# Altium PCB PCB1.1.PcbDoc (part 2 of 2)
Units mm, origin at the board's own origin, x right, y up, seen from the top; angles counter-clockwise.
Board outline 50 x 50 mm, 4 copper layers (Top Layer, Mid-Layer 1, Mid-Layer 2, Bottom Layer); 153 components, 106 nets, 555 pads, 173 vias.
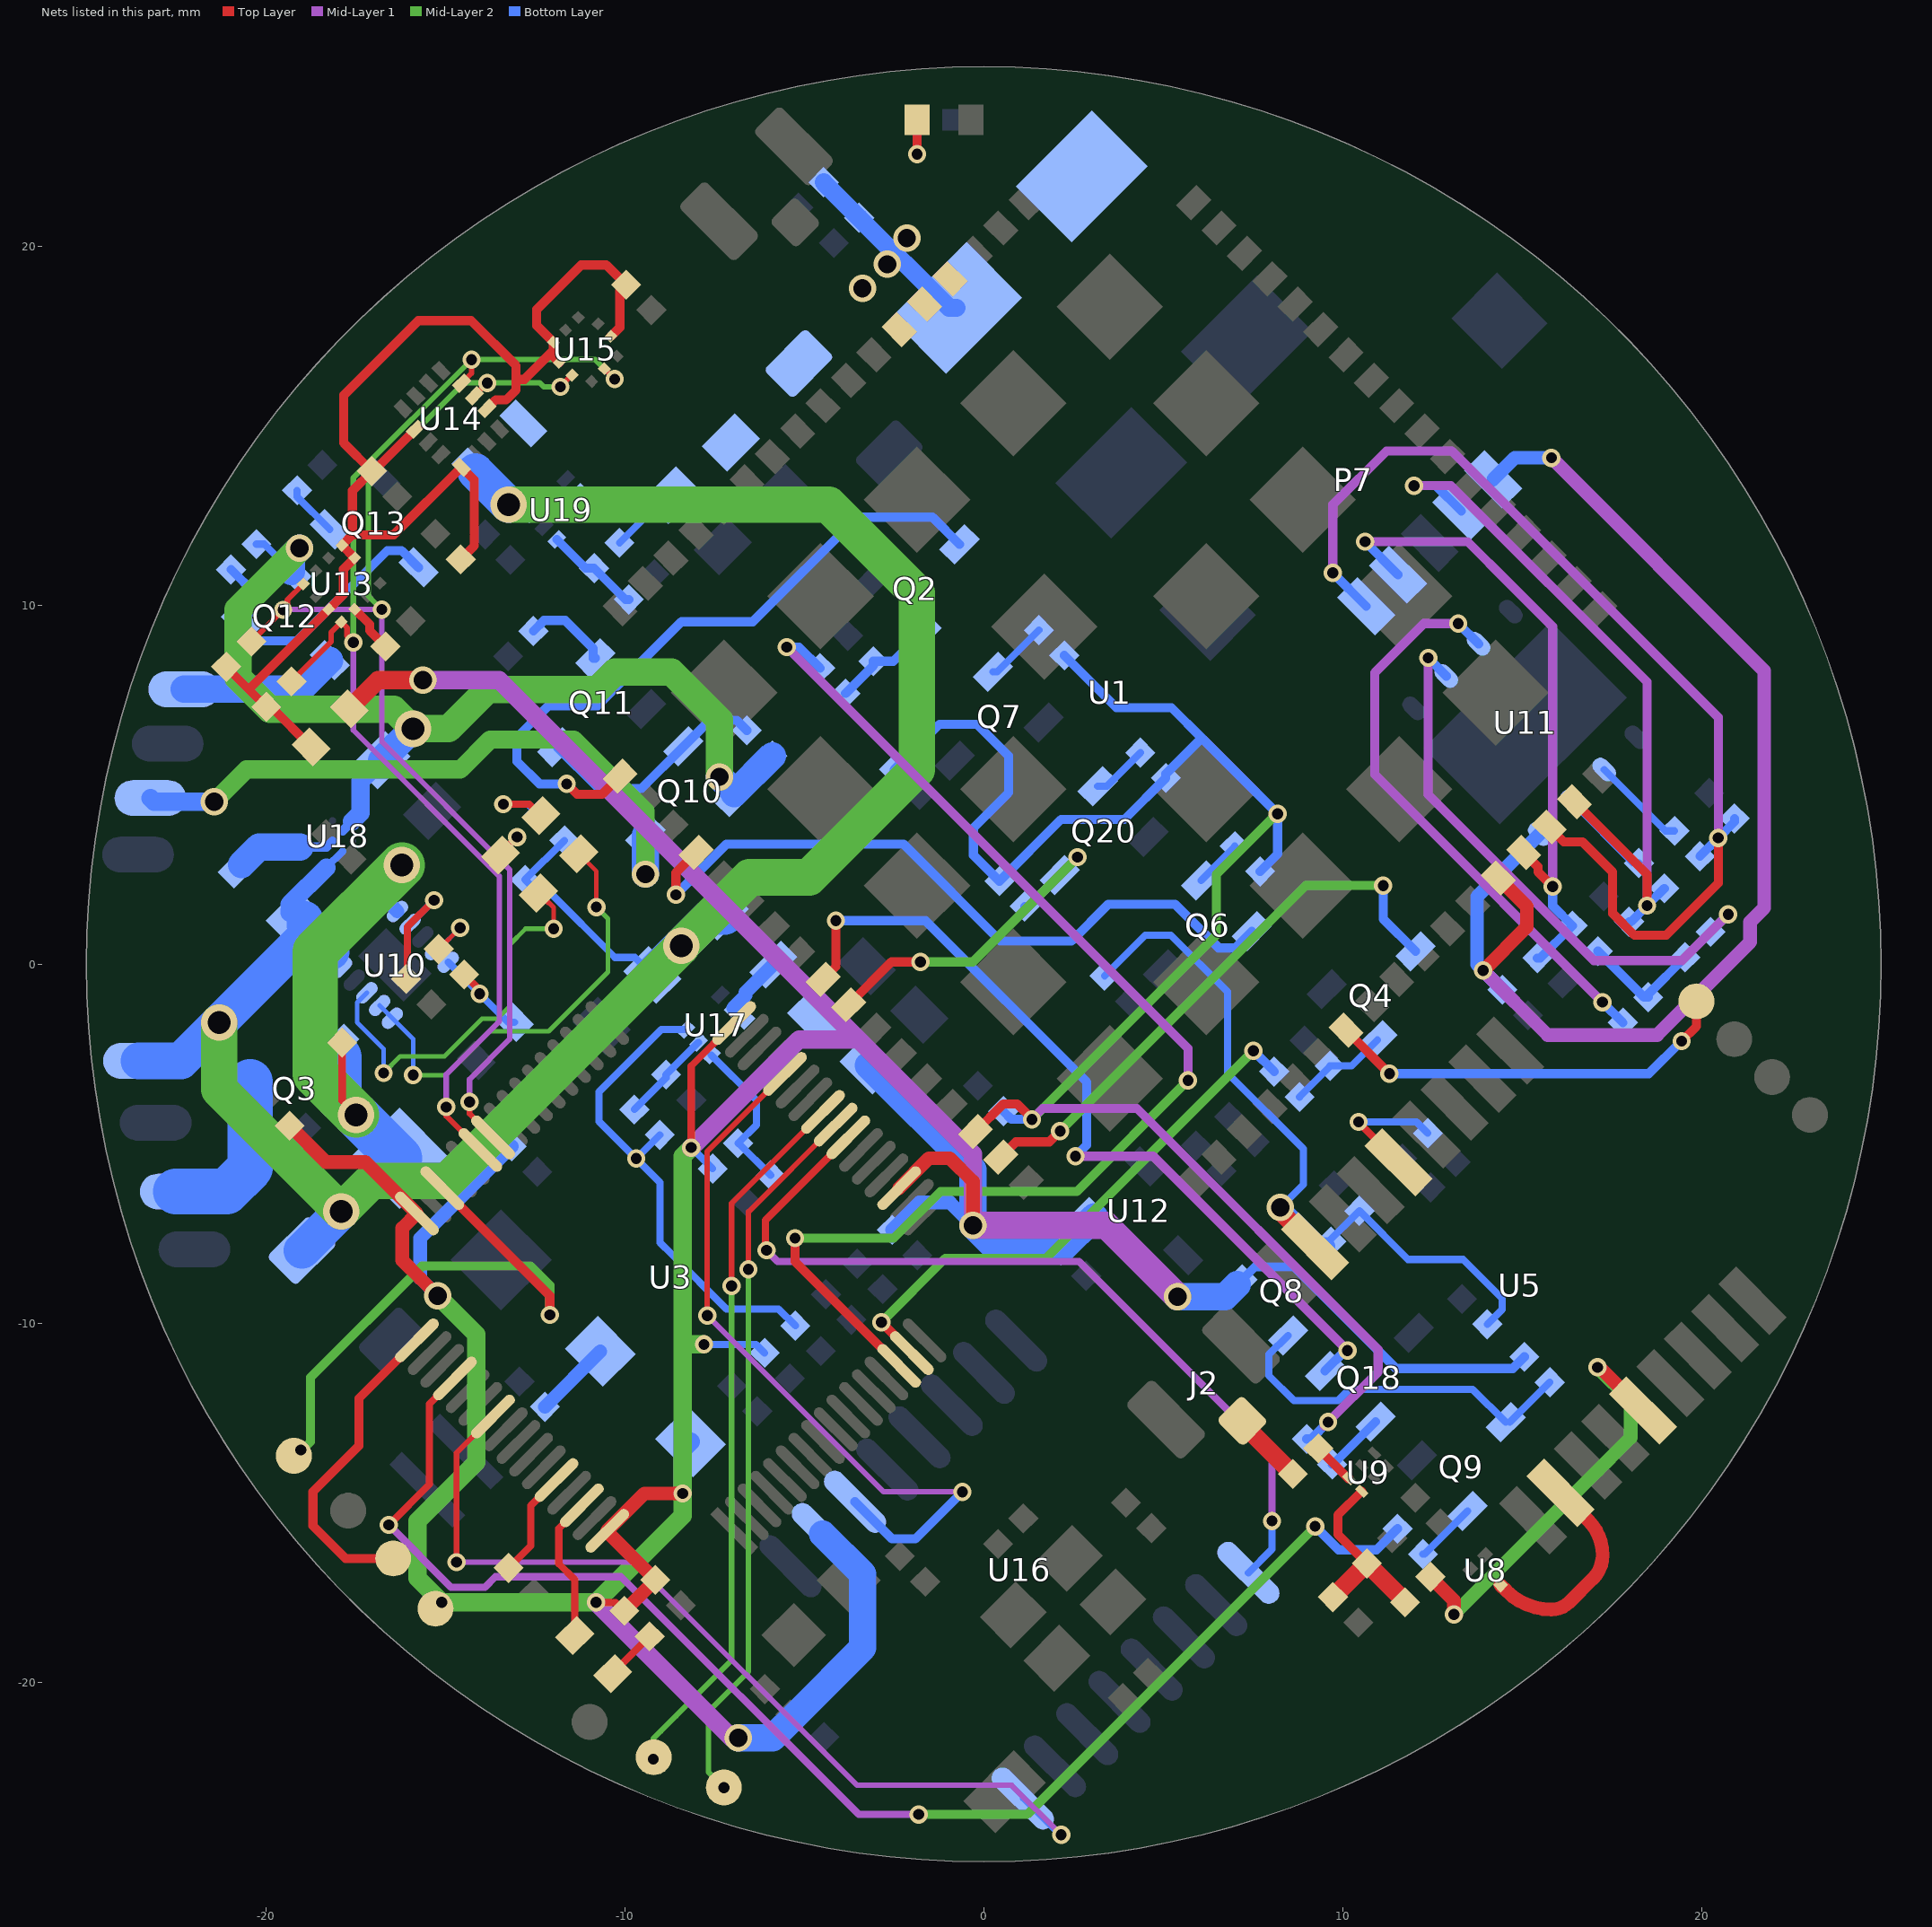
[diagram p4: the nets of this part, all layers, seen from the top]

## Via types
v1: diameter 0.508, hole 0.305, Top Layer to Bottom Layer, tented both sides, 144 vias
v2: diameter 0.762, hole 0.508, Top Layer to Bottom Layer, tented both sides, 21 vias
v3: diameter 1.016, hole 0.635, Top Layer to Bottom Layer, tented both sides, 8 vias

## Nets (pads, with @x,y where several pads share a name; then routed paths per layer and width w, separated by ;. In a path a pad name is that pad's centre, name@x,y a point inside that pad or via, vN(x,y) a via of type N, cw(c..) or ccw(c..) an arc to the next point about the centre after c; other vN are vias at no path point) (continued)
NetC27_1: C27.1 D2.2 Q3.3 U10.1 | length 15.2
  Top Layer w0.203: C27.1@-17.876,-2.181 -17.876,-3.807 v3(-17.485,-4.198)
  Mid-Layer 2 w1.27: v3(-17.485,-4.198) -18.627,-3.056 -18.627,0.344 v3(-16.211,2.76)
  Bottom Layer w0.381: -16.731,2.24 -16.731,1.863 U10.1@-16.336,1.468
  Bottom Layer w1.016: -16.731,2.24 v3(-16.211,2.76)
  Bottom Layer w1.27: Q3.3@-18.004,-2.55 -17.964,-2.59 -17.964,-3.719 ; v3(-17.485,-4.198) D2.2@-16.276,-5.407
NetC40_1: C40.1 U13.5 | length 1.4
  Top Layer w0.254: U13.5@-17.527,9.885 -17.11,9.468 -17.11,9.293 C40.1@-16.669,8.852
NetD1_2: D1.2 R7.1 | length 2.2
  Bottom Layer w0.381: R7.1@-12.226,-12.329 D1.2@-10.682,-10.784
NetJ2_1: J2.1 L3.2 | length 2.1
  Top Layer w0.508: J2.1@7.201,-12.718 7.201,-12.787 L3.2@8.611,-14.196
NetL2_1: L2.1 U5.14 | length 12.9
  Top Layer w0.381: L2.1@12.443,-17.067 13.096,-17.72 v1(13.096,-18.11) ; v1(17.097,-11.227) 17.161,-11.227 U5.14@18.364,-12.43
  Mid-Layer 2 w0.381: v1(13.096,-18.11) 17.109,-14.097 ; v1(17.097,-11.227) 18.023,-12.153 18.023,-13.183 17.109,-14.097 ; 17.468,-13.738 17.109,-14.097
NetL3_1: L3.1 U9.3 | length 1.2
  Top Layer w0.254: L3.1@9.318,-13.489 10.154,-14.325 U9.3@10.175,-14.325
NetL4_1: L4.1 U17.5 | length 1.7
  Bottom Layer w0.381: U17.5@-6.982,-1.214 -6.637,-0.869 -6.637,-0.783 L4.1@-5.869,-0.015
NetL5_2: L5.2 U18.B1 | length 2.8
  Bottom Layer w0.254: -19.051,3.263 -18.313,3.263 U18.B1@-18.144,3.432
  Bottom Layer w0.762: L5.2@-20.682,2.776 -20.194,3.263 -19.051,3.263
NetL6_1: L6.1 U19.5
NetLED1_2: LED1.2 R9.1 | length 1.9
  Top Layer w0.254: v1(-1.857,22.562) LED1.2@-1.857,23.523
  Bottom Layer w0.254: v1(-1.857,22.562) R9.1@-1.857,23.523
NetLED2_1: LED2.1 R29.2 | length 2.3
  Top Layer w0.203: v1(-13.386,4.458) -12.663,4.458 LED2.1@-12.342,4.137
  Bottom Layer w0.203: v1(-13.386,4.458) -12.692,4.458 R29.2@-12.39,4.156
NetLED2_2: LED2.2 U10.6 U10.7 | length 13
  Top Layer w0.127: LED2.2@-11.281,3.076 -10.792,2.587 ; v1(-10.792,1.593) -10.792,2.587 ; -10.792,2.194 -10.792,2.587
  Mid-Layer 2 w0.127: v1(-15.899,-3.088) -14.994,-3.088 -13.773,-1.867 -12.121,-1.867 -10.472,-0.218 -10.472,1.273 v1(-10.792,1.593)
  Bottom Layer w0.127: U10.7@-16.831,-1.148 U10.6@-16.478,-1.502 -15.899,-2.081 v1(-15.899,-3.088)
NetLED4_1: LED4.1 R12.2 | length 1.4
  Top Layer w0.203: LED4.1@-13.468,3.043 -13.468,3.078 v1(-13.003,3.543)
  Bottom Layer w0.203: R12.2@-13.485,3.06 v1(-13.003,3.543)
NetLED4_2: LED4.2 U10.8 | length 11.6
  Top Layer w0.127: -12.139,1.714 LED4.2@-12.407,1.982 -12.382,1.982 -11.982,1.582 v1(-11.982,0.99)
  Mid-Layer 2 w0.127: v1(-16.722,-3.028) -16.261,-2.567 -15.027,-2.567 -13.976,-1.516 -13.552,-1.516 -13.206,-1.17 -13.206,0.548 -12.764,0.99 v1(-11.982,0.99)
  Bottom Layer w0.127: U10.8@-17.185,-0.795 -17.458,-1.068 -17.458,-1.622 -16.722,-2.358 v1(-16.722,-3.028)
NetLED5_1: LED5.1 R65.1 | length 1.5
  Top Layer w0.203: LED5.1@-10.335,-19.758 -10.335,-19.746 R65.1@-9.31,-18.721
NetLED5_2: LED5.2 U3.62 | length 4.1
  Top Layer w0.203: LED5.2@-11.396,-18.697 -11.396,-17.141 -11.839,-16.698 -11.839,-15.715 U3.62@-11.198,-15.074
NetQ2_1: Q2.1 R10.1 R11.1 | length 2.9
  Bottom Layer w0.254: R10.1@-3.853,7.542 -3.077,8.318 R11.1@-3.077,8.438 -2.521,8.438 Q2.1@-1.737,9.223
NetQ4_1: Q4.1 R4.1 R16.1 | length 2.8
  Bottom Layer w0.203: R16.1@8.797,-3.697 9.645,-2.849 R4.1@9.645,-2.832 10.247,-2.832 Q4.1@10.968,-2.112
NetQ6_1: Q6.1 R28.1 | length 1.3
  Bottom Layer w0.203: Q6.1@6.057,2.331 6.993,3.267 R28.1@6.993,3.291
NetQ7_1: Q7.1 R31.1 | length 1.8
  Bottom Layer w0.203: Q7.1@0.253,8.144 0.373,8.144 R31.1@1.536,9.307
NetQ8_1: Q8.1 Q9.3 R33.2 | length 10.3
  Bottom Layer w0.203: Q8.1@8.476,-10.338 7.946,-10.868 7.946,-11.462 8.639,-12.155 9.866,-12.155 10.181,-11.84 13.62,-11.84 Q9.3@14.538,-12.758 ; Q9.3@14.654,-12.758 R33.2@15.768,-11.644
NetQ9_1: Q9.1 R34.1 | length 1.7
  Bottom Layer w0.203: R34.1@12.234,-16.432 12.279,-16.432 Q9.1@13.478,-15.233
NetQ10_1: Q10.1 Q11.3 R36.2 | length 6.7
  Bottom Layer w0.254: Q11.3@-11.886,6.05 -10.734,4.899 -9.534,4.899 Q10.1@-8.367,6.067 -7.641,6.792 -6.88,6.792 R36.2@-6.602,6.514
NetQ11_1: Q11.1 R37.1 | length 2.5
  Bottom Layer w0.254: R37.1@-12.547,9.281 -12.253,9.575 -11.666,9.575 -10.879,8.788 Q11.1@-10.879,8.579 ; Q11.1@-10.879,8.579 Q11.1@-10.825,8.525 -10.879,8.525 Q11.1@-10.879,8.579
NetQ12_1: Q12.1 Q13.3 R50.2 | length 8.3
  Bottom Layer w0.254: R50.2@-20.971,10.994 -20.305,10.328 -20.305,9.926 Q12.1@-20.701,9.53 -20.175,9.004 -19.14,9.004 -16.622,11.522 -16.217,11.522 Q13.3@-15.748,11.053
NetQ13_1: Q13.1 R51.1 | length 1.5
  Bottom Layer w0.203: R51.1@-19.131,13.2 -19.131,13.022 Q13.1@-18.223,12.114
NetQ18_1: Q18.1 R40.1 | length 1.7
  Bottom Layer w0.254: R40.1@9.707,-13.93 9.73,-13.93 Q18.1@10.916,-12.744
NetQ20_1: Q20.1 R44.1 | length 1.6
  Bottom Layer w0.203: Q20.1@3.173,4.956 3.426,4.956 R44.1@4.364,5.894
NetR3_1: R3.1 U3.60 | length 3
  Top Layer w0.203: R3.1@-13.239,-16.816 -12.62,-16.197 -12.62,-15.082 U3.60@-11.905,-14.367
NetR13_1: R13.1 U10.2 | length 3.5
  Top Layer w0.203: R13.1@-16.095,-0.41 -16.053,-0.368 -16.053,1.044 v1(-15.313,1.784)
  Bottom Layer w0.203: U10.2@-15.983,1.114 v1(-15.313,1.784)
NetR14_1: R14.1 R15.2 U10.5 | length 3.3
  Top Layer w0.203: R14.1@-14.476,-0.286 -14.044,-0.719 v1(-14.044,-0.824)
  Bottom Layer w0.203: U10.5@-14.922,0.054 v1(-14.044,-0.824) -13.251,-1.617 R15.2@-13.075,-1.617
NetR14_2: R14.2 U10.4 | length 1.8
  Top Layer w0.127: R14.2@-15.183,0.421 v1(-14.591,1.013)
  Bottom Layer w0.127: U10.4@-15.276,0.407 -15.197,0.407 v1(-14.591,1.013)
NetR18_1: R18.1 U5.5 | length 3.6
  Top Layer w0.203: v1(10.443,-4.39) 10.443,-4.402 U5.5@11.559,-5.517
  Bottom Layer w0.203: v1(10.443,-4.39) 12.056,-4.39 R18.1@12.371,-4.705
NetR19_2: R19.2 R20.2 U19.1 | length 2.7
  Bottom Layer w0.254: U19.1@-11.897,11.831 -11.097,11.032 R19.2@-10.857,11.032 -9.985,10.16 R20.2@-9.886,10.16
NetR21_2: R21.2 R48.2 U17.1 | length 4.5
  Bottom Layer w0.203: U17.1@-7.591,-2.53 -6.335,-3.786 -6.335,-4.475 R21.2@-6.847,-4.987 -6.832,-4.987 R48.2@-5.938,-5.881
NetR23_2: R23.2 U11.7 | length 2.6
  Bottom Layer w0.203: U11.7@16.387,4.526 18.094,2.819 R23.2@18.253,2.819
NetR25_1: R25.1 U11.3 | length 16.3
  Mid-Layer 1 w0.254: v1(13.218,9.491) 12.262,9.491 10.895,8.124 10.895,5.284 11.684,4.495 v1(17.236,-1.057)
  Bottom Layer w0.254: v1(13.218,9.491) U11.3@13.785,8.924 ; v1(17.236,-1.057) R25.1@17.806,-1.627
NetR25_2: R25.2 R26.2 R27.2 | length 3.5
  Bottom Layer w0.254: R27.2@17.11,0.365 18.395,-0.92 R25.2@18.513,-0.92 18.513,-0.835 R26.2@19.542,0.194
NetR26_1: R26.1 U11.2 | length 16
  Mid-Layer 1 w0.254: v1(12.382,8.531) 12.382,4.721 17,0.103 19.451,0.103 v1(20.739,1.391)
  Bottom Layer w0.254: v1(12.382,8.531) U11.2@12.887,8.026 ; R26.1@20.249,0.901 v1(20.739,1.391)
NetR35_2: R35.2 R49.2 U17.2 | length 2.6
  Bottom Layer w0.203: R49.2@-9.734,-4.046 -8.853,-3.165 R35.2@-8.853,-3.076 -7.954,-2.176 U17.2@-7.944,-2.176
NetR39_2: R39.2 U11.6 | length 2.7
  Bottom Layer w0.203: U11.6@17.285,5.424 18.996,3.713 R39.2@19.245,3.713
POWER_CTRL_GPS: R34.2 U3.52 | length 40.4
  Top Layer w0.203: v1(-16.575,-15.618) -15.444,-14.487 -15.444,-12.249 U3.52@-14.733,-11.538
  Mid-Layer 1 w0.203: v1(-16.575,-15.618) -14.843,-17.35 -14.541,-17.35 -14.122,-17.35 -13.899,-17.35 -13.609,-17.06 -10.104,-17.06 -3.481,-23.683 v1(-1.814,-23.683)
  Mid-Layer 2 w0.254: v1(-1.814,-23.683) 1.208,-23.683 v1(9.233,-15.658)
  Bottom Layer w0.254: v1(9.233,-15.658) 9.885,-16.31 10.942,-16.31 R34.2@11.527,-15.725
PWRKEY: Q2.3 U1.1 | length 19.3
  Top Layer w0.254: v1(-11.619,5.023) -11.333,4.737 -10.63,4.737 U1.1@-10.132,5.235
  Bottom Layer w0.254: v1(-11.619,5.023) -12.377,5.023 -13.006,5.652 -13.006,6.322 -12.129,7.199 -10.763,7.199 -8.424,9.538 -6.436,9.538 -3.522,12.452 -1.431,12.452 Q2.3@-0.676,11.698
RESET: Q4.3 U1.16 | length 16.4
  Top Layer w0.254: U1.16@0.474,-5.372 0.896,-4.95 1.825,-4.95 v1(2.127,-4.648)
  Mid-Layer 2 w0.254: v1(2.127,-4.648) 8.971,2.196 10.089,2.196 ; 10.477,2.196 10.089,2.196 ; v1(11.127,2.19) 11.121,2.196 10.089,2.196
  Bottom Layer w0.254: v1(11.127,2.19) 11.127,1.265 Q4.3@12.028,0.363
RF_IN: U5.11 U8.1 | length 6
  Top Layer w0.381: U8.1@14.397,-17.291 14.566,-17.46 ccw(c15.81,-16.215) 15.81,-17.975 ccw(c15.81,-17.258) 16.317,-17.765 16.971,-17.111 ccw(c16.319,-16.459) 17.241,-16.459 ccw(c15.875,-16.459) 16.841,-15.493 U5.11@16.071,-14.723
RI: Q6.2 U1.4 | length 20.3
  Top Layer w0.254: v1(-8.575,1.936) -8.575,2.549 U1.4@-8.011,3.113
  Bottom Layer w0.254: v1(-8.575,1.936) -7.163,3.348 -2.24,3.348 0.462,0.646 2.445,0.646 3.472,1.673 5.326,1.673 6.546,0.453 7.007,0.453 Q6.2@7.471,0.917
RXD3: T18.1 U3.25 | length 20.6
  Top Layer w0.152: v1(-7.026,-8.96) -7.026,-6.66 U3.25@-4.48,-4.114
  Mid-Layer 2 w0.152: v1(-9.21,-22.142) -9.21,-21.571 -8.576,-20.937 ; -8.999,-21.36 -8.576,-20.937 ; v1(-7.026,-8.96) -7.026,-19.387 -8.576,-20.937
SCL: R22.2 U3.42 U13.1 U14.13 U15.2 | length 33.1
  Top Layer w0.152: R22.2@-20.399,8.991 v1(-19.521,9.869) -19.402,9.988 -19.402,10.149 U13.1@-18.958,10.592 ; v1(-14.327,-3.835) -14.327,-4.166 U3.42@-13.673,-4.821 ; U14.13@-14.191,15.834 v1(-13.834,16.191) ; v1(-11.797,16.084) U15.2@-11.472,16.409
  Mid-Layer 1 w0.152: v1@-19.477,9.971 -19.386,9.88 v1(-16.771,9.88) -16.771,6.199 -13.209,2.637 -13.209,-2.088 -14.327,-3.206 v1(-14.327,-3.835)
  Mid-Layer 2 w0.152: v1(-16.771,9.88) -17.146,10.255 -17.146,13.53 -14.485,16.191 v1(-13.834,16.191) -12.366,16.191 -12.259,16.084 v1(-11.797,16.084)
SCLK: U3.55 U16.16 | length 26
  Top Layer w0.152: v1(-14.689,-16.654) -14.689,-13.616 U3.55@-13.673,-12.599
  Mid-Layer 1 w0.152: v1(-14.689,-16.654) -9.748,-16.654 -3.531,-22.871 0.778,-22.871 v1(2.157,-24.25)
  Bottom Layer w0.152: U16.16@1.086,-23.24 2.096,-24.25 v1(2.157,-24.25)
SDA: R24.1 U3.43 U13.4 U14.14 U15.4 | length 34.4
  Top Layer w0.152: R24.1@-19.285,7.877 -18.179,8.984 -18.179,9.25 U13.4@-17.898,9.531 -17.74,9.373 -17.74,9.141 v1(-17.564,8.965) ; v1(-14.976,-3.976) -14.976,-4.224 U3.43@-14.026,-5.174 ; U14.14@-14.545,16.187 -14.271,16.461 v1(-14.271,16.841) ; U15.4@-10.57,16.586 v1(-10.283,16.299)
  Mid-Layer 1 w0.152: v1(-17.564,8.965) -17.564,6.521 -13.499,2.456 -13.499,-1.594 -14.976,-3.071 v1(-14.976,-3.976)
  Mid-Layer 2 w0.152: v1(-17.564,8.965) -17.564,13.548 v1(-14.271,16.841) -10.825,16.841 v1(-10.283,16.299)
SIM_CLK: C17.2 P7.1 R39.1 U1.32 | length 31
  Top Layer w0.254: U1.32@15.748,3.82 16.156,3.412 16.675,3.412 17.521,2.566 17.521,1.707 17.521,1.411 18.126,0.806 19.013,0.806 20.463,2.256 v1(20.463,3.517)
  Mid-Layer 1 w0.254: v1(9.724,10.9) 9.724,12.8 11.217,14.293 13.045,14.293 20.463,6.875 v1(20.463,3.517)
  Bottom Layer w0.254: v1(9.724,10.9) P7.1@10.655,9.969 ; R39.1@19.952,3.006 v1(20.463,3.517) 20.916,3.97 C17.2@20.916,4.061
SIM_DATA: C18.2 P7.2 R27.1 U1.31 | length 19.9
  Top Layer w0.254: U1.31@15.041,3.113 15.439,2.715 15.439,2.573 v1(15.848,2.164)
  Mid-Layer 1 w0.254: v1(10.621,11.771) 13.479,11.771 14.646,10.604 ; 15.497,9.753 14.646,10.604 ; v1(15.848,2.164) 15.848,9.402 14.646,10.604
  Bottom Layer w0.254: v1(10.621,11.771) P7.2@11.539,10.853 ; C18.2@15.421,0.171 15.502,0.171 R27.1@16.403,1.072 15.848,1.627 v1(15.848,2.164)
SIM_PWR: R10.2 U3.14 | length 35.4
  Top Layer w0.254: v1(-5.26,-7.631) -5.26,-8.284 U3.14@-2.359,-11.185
  Mid-Layer 1 w0.254: v1(-5.489,8.835) 5.689,-2.343 v1(5.689,-3.237)
  Mid-Layer 2 w0.254: v1(-5.26,-7.631) -2.506,-7.631 -1.208,-6.333 2.593,-6.333 v1(5.689,-3.237)
  Bottom Layer w0.254: v1(-5.489,8.835) -5.146,8.835 R10.2@-4.56,8.249
SIM_RST: C16.2 P7.4 R23.1 U1.33 | length 21.7
  Top Layer w0.254: U1.33@16.455,4.527 18.48,2.503 v1(18.48,1.632)
  Mid-Layer 1 w0.254: v1(11.988,13.329) 13.013,13.329 18.48,7.862 v1(18.48,1.632)
  Bottom Layer w0.254: v1(11.988,13.329) 12.598,13.329 P7.4@13.307,12.621 ; C16.2@17.978,1.184 18.032,1.184 v1(18.48,1.632) R23.1@18.96,2.112
SIM_RST1: R16.2 U3.15 | length 15.5
  Top Layer w0.254: v1(-2.853,-9.972) -2.005,-10.82 U3.15@-2.005,-10.831
  Mid-Layer 2 w0.254: v1(-2.853,-9.972) -1.073,-8.192 1.732,-8.192 v1(7.512,-2.412)
  Bottom Layer w0.254: v1(7.512,-2.412) R16.2@8.09,-2.99
SIM_RXD: Q20.3 R46.1 U1.10 | length 10.1
  Top Layer w0.254: U1.10@-3.768,-1.129 -2.574,0.065 v1(-1.764,0.065)
  Mid-Layer 2 w0.254: v1(-1.764,0.065) -0.304,0.065 v1(2.612,2.981)
  Bottom Layer w0.254: R46.1@1.141,1.609 1.24,1.609 Q20.3@2.112,2.481 v1(2.612,2.981)
SIM_TXD: Q18.2 U1.9 | length 23.5
  Top Layer w0.254: U1.9@-4.475,-0.422 -4.119,-0.066 v1(-4.119,1.215)
  Mid-Layer 1 w0.254: v1(2.556,-5.347) 4.72,-5.347 v1(10.132,-10.759)
  Bottom Layer w0.254: v1(-4.119,1.215) -1.624,1.215 2.868,-3.277 2.868,-5.035 v1(2.556,-5.347) ; Q18.2@9.502,-11.33 v1@10.073,-10.759
SIM_VDD: C14.2 P7.5 U1.30 U11.8 | length 36
  Top Layer w0.381: v1(13.912,-0.175) 15.129,1.042 15.129,1.611 U1.30@14.334,2.406
  Mid-Layer 1 w0.381: v1(13.912,-0.175) 15.71,-1.973 18.758,-1.973 21.35,0.619 21.35,1.178 21.744,1.572 21.744,8.175 v1(15.814,14.105)
  Bottom Layer w0.381: P7.5@14.191,13.505 14.791,14.105 v1(15.814,14.105) ; C14.2@14.451,-0.714 13.743,-0.006 13.743,1.882 U11.8@15.489,3.628
SPI_RESET: U3.28 U16.3 | length 20.7
  Top Layer w0.152: v1(-7.703,-9.785) -7.703,-5.215 U3.28@-5.541,-3.053
  Mid-Layer 1 w0.152: v1(-7.703,-9.785) -3.16,-14.328 -2.791,-14.697 v1(-0.597,-14.697)
  Bottom Layer w0.254: U16.3@-3.588,-14.974 -2.555,-16.007 -1.907,-16.007 v1(-0.597,-14.697)
SWCLK: T10.1 U3.49 | length 9
  Top Layer w0.254: T10.1@-16.453,-16.552 -17.781,-16.552 -18.691,-15.642 -18.691,-14.693 -17.407,-13.409 -17.407,-12.091 U3.49@-15.794,-10.478
SWD: T9.1 U3.46 | length 15.9
  Top Layer w0.254: U3.46@-15.087,-6.235 -12.09,-9.232 v1(-12.09,-9.765)
  Mid-Layer 2 w0.254: v1@-19.006,-13.551 -18.759,-13.304 -18.759,-11.513 -15.653,-8.407 -12.631,-8.407 -12.09,-8.948 v1(-12.09,-9.765)
  other v1: -19.026,-13.531
TXD3: T11.1 U3.24 | length 20.1
  Top Layer w0.152: v1(-6.556,-8.5) -6.556,-6.897 U3.24@-4.127,-4.467
  Mid-Layer 2 w0.152: v1(-7.239,-22.936) -7.666,-22.509 -7.666,-20.811 -6.556,-19.701 v1(-6.556,-8.5)
VBAT: C44.1 D4.2 L4.2 L5.1 L6.2 R2.1 R12.1 R29.1 R49.1 T17.1 U10.10 U17.3 U18.A1 U19.3 | length 80.7
  Mid-Layer 2 w1.016: v3(-21.3,-1.625) -21.3,-3.489 v3(-17.904,-6.885) -17.056,-6.037 -14.945,-6.037 -8.43,0.478 v3(-8.43,0.514) -6.523,2.421 -4.866,2.421 -1.866,5.421 -1.866,10.346 -4.319,12.799 -11.034,12.799 v3@-13.139,12.799
  Bottom Layer w0.203: -18.317,2.693 U18.A1@-17.862,3.149 ; R29.1@-11.683,3.449 R12.1@-12.778,2.353 -12.431,2.007 -12.094,2.007 -10.277,0.19 -9.724,0.19 C44.1@-9.235,-0.299 ; v1(-9.684,-5.41) R49.1@-9.027,-4.753 ; U17.3@-8.304,-1.817 -8.98,-1.817 -10.722,-3.559 -10.722,-4.381 -9.02,-6.083 -9.02,-7.75 -8.696,-8.074 -7.17,-9.6 -5.717,-9.6 R2.1@-5.249,-10.068
  Bottom Layer w0.508: L5.1@-19.338,1.432 L5.1@-19.338,1.506 ; -18.915,1.249 -19.338,1.672 -18.317,2.693
  Bottom Layer w1.016: T17.1@-23.538,-2.693 -22.368,-2.693 -18.753,0.922 ; D4.2@-18.994,-7.975 v3(-17.904,-6.885) ; -18.915,1.249 -18.915,1.083 -18.753,0.922 ; -18.181,0.349 -18.753,0.922 ; L6.2@-14.166,13.724 v3(-13.24,12.799) ; C44.1@-9.235,-0.299 -9.235,-0.291 v3(-8.43,0.514) -7.615,1.329 L4.2@-7.213,1.329
VBAT_OUT: C24.2 C29.1 C31.1 C43.2 C47.1 C48.1 D3.2 R19.1 U1.55 U1.56 U1.57 U19.6 | length 7.2
  Bottom Layer w0.203: R19.1@-10.15,11.739 -8.826,13.063 C47.1@-8.684,13.063
  Bottom Layer w0.508: C43.2@-4.459,21.783 C24.2@-3.471,20.795 -0.96,18.284 C29.1@-0.763,18.284
  other v2: -3.382,18.823 -2.688,19.497 -2.145,20.224
VBUS: T1.1 U1.24 | length 11.5
  Top Layer w0.254: U1.24@10.091,-1.837 v1(11.302,-3.047) ; v1(19.444,-2.143) 19.854,-1.733 T1.1@19.854,-1.034
  Bottom Layer w0.254: v1(11.302,-3.047) 18.527,-3.047 v1@19.428,-2.146
VCC_3.3V_S: C32.2 Q8.3 R30.2 R42.2 U5.8 | length 22
  Top Layer w0.508: v2@8.263,-6.888 U5.8@9.225,-7.851
  Bottom Layer w0.203: R30.2@3.363,-0.324 4.499,0.812 5.21,0.812 6.791,-0.769 6.791,-3.035 8.901,-5.145 8.901,-6.136 v2(8.263,-6.774) ; Q8.3@9.537,-7.863 9.537,-7.797 C32.2@10.464,-6.869 11.819,-8.224 13.353,-8.224 14.44,-9.311 14.44,-9.618 R42.2@14.029,-10.029
  Bottom Layer w0.508: v2(8.263,-6.774) 9.352,-7.863 Q8.3@9.537,-7.863
VCC_3V: C11.2 C12.2 C13.2 C15.2 C28.1 C34.1 C37.1 C50.2 D1.1 FB2.1 Q8.2 R6.1 R21.1 R33.1 R65.2 T19.1 U3.19 U3.32 U3.48 U3.64 U12.1 U16.2 U17.6 | length 135.4
  Top Layer w0.203: v1(-10.803,-17.775) -10.256,-17.775 R65.2@-10.017,-18.014 ; v1(-8.153,-5.107) -8.153,-2.837 U3.32@-6.955,-1.639
  Top Layer w0.381: C13.2@-19.338,-4.498 -18.324,-5.512 -17.224,-5.512 U3.48@-15.794,-6.942 -16.2,-7.348 -16.2,-8.251 -15.702,-8.749 v2(-15.217,-9.234) ; R65.2@-10.017,-18.014 -10.015,-18.014 C12.2@-9.149,-17.148 -10.491,-15.806 U3.64@-10.491,-15.781 -9.454,-14.744 v1(-8.39,-14.744) ; U3.19@-2.359,-6.235 -1.53,-5.406 -0.945,-5.406 -0.302,-6.049 v2(-0.302,-7.275)
  Top Layer w0.508: FB2.1@-17.676,7.116 -16.879,7.913 v2(-15.627,7.913)
  Mid-Layer 1 w0.508: v2(-15.627,7.913) -13.497,7.913 -3.484,-2.1 ; v1(-10.803,-17.775) -7.028,-21.55 v2(-6.839,-21.55) ; v1(-8.153,-5.107) -5.146,-2.1 -3.484,-2.1 ; v2(-0.302,-7.275) -0.302,-5.282 -3.484,-2.1
  Mid-Layer 1 w0.762: v2(-0.302,-7.275) 3.413,-7.275 v2(5.401,-9.263)
  Mid-Layer 2 w0.508: v2(-15.217,-9.234) -14.142,-10.309 -14.142,-13.875 -15.778,-15.511 -15.778,-17.098 v1(-15.101,-17.775) v1(-10.803,-17.775) -8.39,-15.362 v1(-8.39,-14.744) -8.39,-5.344 v1(-8.153,-5.107) ; -8.117,-10.589 v1(-7.797,-10.589)
  Bottom Layer w0.203: v1(-8.153,-5.107) -8.141,-5.107 R21.1@-7.554,-5.694 ; v1(-7.797,-10.589) -6.344,-10.589 R6.1@-6.107,-10.826 R6.1@-6.194,-10.739
  Bottom Layer w0.254: Q8.2@7.062,-8.924 7.556,-8.43 8.652,-8.43 11.484,-11.262 14.736,-11.262 R33.1@15.061,-10.937
  Bottom Layer w0.381: v2(-15.217,-9.234) -15.702,-8.749 ; C50.2@-13.149,-5.074 -15.702,-7.627 -15.702,-8.405 ; C15.2@-2.556,-7.398 -1.794,-6.636 -0.941,-6.636 v2(-0.302,-7.275) ; -15.702,-8.749 -15.702,-8.405 ; -15.702,-8.749 -15.702,-8.405
  Bottom Layer w0.508: v1(-8.39,-14.744) -8.39,-13.522 D1.1@-8.167,-13.299
  Bottom Layer w0.762: v2(-6.839,-21.55) -5.883,-21.55 C11.2@-5.153,-20.82 -3.372,-19.039 -3.372,-16.986 U16.2@-4.486,-15.872 ; C28.1@-3.21,-2.817 -0.302,-5.725 v2(-0.302,-7.275) 0.398,-7.975 C37.1@2.147,-7.975 U12.1@3.081,-7.041 ; v2(5.401,-9.263) 6.723,-9.263 Q8.2@7.062,-8.924
VCC_3V_SENSOR: C35.2 C38.2 C41.2 FB2.2 R22.1 R24.2 U13.3 U13.9 U13.10 U14.5 U14.8 U14.12 U15.1 U15.6 U15.10 | length 37.8
  Top Layer w0.254: R22.1@-21.106,8.284 -20.469,7.647 ; FB2.2@-18.736,6.055 -19.851,7.17 R24.2@-19.992,7.17 -20.469,7.647 ; U14.5@-15.831,14.9 -16.998,13.734 C41.2@-17.046,13.734 ; C38.2@-14.572,11.28 -14.197,11.655 -14.197,13.492 U14.8@-14.552,13.847 -16.438,11.961 -17.59,11.961 ; U14.12@-13.837,15.48 -13.598,15.72 -13.305,15.72 -13.03,15.995 -13.03,16.288 ; U15.1@-11.825,16.763 -11.99,16.927 -11.99,17.098 ; U15.6@-10.393,17.488 -10.14,17.741 -10.14,18.754 C35.2@-9.966,18.928 -10.516,19.478 -11.216,19.478 -12.454,18.24 -12.454,17.787 U15.10@-11.99,17.323 -11.99,17.098 ; -20.469,7.647 -20.469,7.667 U13.3@-18.251,9.885 -17.838,10.298 -17.838,11.006 U13.9@-17.527,11.317 U13.10@-17.88,11.67 -17.59,11.961 ; -17.59,11.961 -17.59,13.19 C41.2@-17.046,13.734 ; C41.2@-17.046,13.734 -17.829,14.517 -17.829,15.851 -15.754,17.926 -14.281,17.926 -13.03,16.675 -13.03,16.288 ; -13.03,16.288 -12.8,16.288 -11.99,17.098
VCC_5V: C46.1 Q10.2 Q12.2 R36.1 R50.1 U18.B2 | length 28.9
  Mid-Layer 2 w0.762: v2(-19.062,11.591) -20.775,9.878 -20.775,7.987 -19.888,7.1 -16.444,7.1 v3(-15.903,6.559) -14.915,6.559 -13.819,7.655 -10.761,7.655 -10.277,8.139 -8.699,8.139 -7.364,6.804 v2(-7.364,5.22)
  Bottom Layer w0.203: R50.1@-20.264,11.701 -20.044,11.701 Q12.2@-19.287,10.944
  Bottom Layer w0.254: U18.B2@-17.862,3.714 -17.603,3.973
  Bottom Layer w0.508: -17.603,3.973 -17.363,4.213 -17.363,5.099 C46.1@-16.781,5.681
  Bottom Layer w0.762: Q12.2@-19.287,10.944 -19.287,11.366 v2(-19.062,11.591) ; C46.1@-16.781,5.681 v3(-15.903,6.559) ; v2(-7.364,5.22) Q10.2@-6.952,4.808 ; Q10.2@-6.952,4.75 R36.1@-5.895,5.807
VCC_5V1: Q10.3 T4.1 | length 18.2
  Mid-Layer 2 w0.508: v2(-21.443,4.526) -20.542,5.427 -14.581,5.427 -13.75,6.258 -11.421,6.258 -9.427,4.264 v2(-9.427,2.508)
  Bottom Layer w0.508: T4.1@-23.217,4.629 -23.114,4.526 v2(-21.443,4.526)
  Bottom Layer w0.762: v2(-9.427,2.508) Q10.3@-9.427,3.592
VCC_5V2: Q12.3 T5.1 | length 4.4
  Bottom Layer w0.762: T5.1@-22.272,7.659 -19.036,7.659 Q12.3@-18.226,8.469
VCC_IN: Q3.2 T15.1 | length 4.7
  Bottom Layer w1.27: T15.1@-22.511,-6.332 -21.096,-6.332 -20.439,-5.675 Q3.2@-20.439,-3.282
VCC_RF: C23.2 C25.2 L2.2 U9.4 | length 5.5
  Top Layer w0.254: U9.4@10.528,-14.678 9.863,-15.344 9.863,-15.881 C25.2@10.672,-16.69
  Top Layer w0.508: C23.2@9.728,-17.627 9.735,-17.627 C25.2@10.672,-16.69 11.736,-17.754 L2.2@11.736,-17.774
VDD_EXT: C33.2 R28.2 R31.2 R32.2 R40.2 R44.2 R46.2 U1.15 | length 55.6
  Top Layer w0.254: U1.15@-0.233,-4.665 0.544,-3.888 0.926,-3.888 1.34,-4.302 v1(1.34,-4.321)
  Mid-Layer 1 w0.254: v1(1.34,-4.321) 1.643,-4.018 4.269,-4.018 10.987,-10.736 10.987,-11.357 v1(9.592,-12.752) v1@9.483,-12.861
  Mid-Layer 2 w0.254: v1(1.34,-4.321) 6.482,0.821 6.482,2.509 v1@8.152,4.179
  Bottom Layer w0.254: R32.2@-2.499,5.422 -1.237,6.684 -0.187,6.684 0.693,5.804 0.693,4.78 -0.29,3.797 -0.29,3.04 R46.2@0.434,2.316 2.152,4.034 3.918,4.034 R44.2@5.071,5.187 5.071,5.304 6.072,6.304 ; C33.2@0.542,-4.093 0.77,-4.321 v1(1.34,-4.321) v1@1.359,-4.321 ; R31.2@2.243,8.6 3.697,7.146 5.23,7.146 6.072,6.304 ; R28.2@7.7,2.584 8.187,3.071 v1(8.187,4.189) 6.072,6.304 ; R40.2@9,-13.223 9.121,-13.223 v1(9.592,-12.752)
WP: U3.23 U16.9 | length 24.1
  Top Layer w0.203: v1@-6.081,-7.94 -6.081,-7.129 U3.23@-3.773,-4.821
  Mid-Layer 1 w0.203: v1(-6.053,-7.968) -5.742,-8.279 -3.233,-8.279 2.652,-8.279 8.03,-13.657 v1(8.03,-15.508)
  Bottom Layer w0.203: U16.9@7.372,-16.954 8.03,-16.296 v1(8.03,-15.508)
pads on no net: P7. P7.0 U1.5 U1.6 U1.7 U1.8 U1.11 U1.12 U1.13 U1.14 U1.19 U1.20 U1.21 U1.22 U1.23 U1.25 U1.26 U1.34 U1.35 U1.36 U1.37 U1.38 U1.40 U1.41 U1.42 U1.43 U1.44 U1.47 U1.48 U1.49 U1.50 U1.51 U1.53 U1.66 U1.67 U1.68 U3.2 U3.9 U3.10 U3.11 U3.20 U3.26 U3.27 U3.29 U3.30 U3.33 U3.34 U3.38 U3.39 U3.40 U3.41 U3.51 U3.53 U3.54 U3.56 U3.61 U5.4 U5.6 U5.7 U5.9 U5.15 U5.16 U5.17 U5.18 U10.9 U11.4 U11.5 U13.2 U13.7 U13.11 U13.12 U14.4 U14.9 U14.10 U14.11 U15.7 U16.1 U16.4 U16.5 U16.6 U16.11 U16.12 U16.13 U16.14 Y1.3 Y2.2 Y2.4

## Polygon pours and split planes (outlines as drawn)
AGND on Bottom Layer "Mid-Layer 1-No Net" (solid, remove dead copper, pour order 1000): -13.802,26.05 -13.014,26.838 22.563,26.838 25.039,26.838 33.934,17.943 32.133,16.142 32.133,-8.064 32.133,-8.739 18.847,-22.025 14.682,-26.19 -12.226,-26.19 -19.545,-26.19 -27.313,-18.422 -34.969,-10.766 -34.969,3.758 -34.969,8.711 -27.088,16.592 -16.867,26.813 -7.647,26.813
AGND on Mid-Layer 2 "Mid-Layer 1-No Net" (solid, remove dead copper, pour order 1001): -13.802,26.05 -13.014,26.838 22.563,26.838 25.039,26.838 33.934,17.943 32.133,16.142 32.133,-8.064 32.133,-8.739 18.847,-22.025 14.682,-26.19 -12.226,-26.19 -19.545,-26.19 -27.313,-18.422 -34.969,-10.766 -34.969,3.758 -34.969,8.711 -27.088,16.592 -16.867,26.813 -7.647,26.813
AGND on Mid-Layer 1 "Mid-Layer 1-No Net" (solid, remove dead copper, pour order 1002): -13.802,26.05 -13.014,26.838 22.563,26.838 25.039,26.838 33.934,17.943 32.133,16.142 32.133,-8.064 32.133,-8.739 18.847,-22.025 14.682,-26.19 -12.226,-26.19 -19.545,-26.19 -27.313,-18.422 -34.969,-10.766 -34.969,3.758 -34.969,8.711 -27.088,16.592 -16.867,26.813 -7.647,26.813
AGND on Top Layer "Mid-Layer 1-No Net" (solid, remove dead copper, pour order 1003): -13.802,26.05 -13.014,26.838 22.563,26.838 25.039,26.838 33.934,17.943 32.133,16.142 32.133,-8.064 32.133,-8.739 18.847,-22.025 14.682,-26.19 -12.226,-26.19 -19.545,-26.19 -27.313,-18.422 -34.969,-10.766 -34.969,3.758 -34.969,8.711 -27.088,16.592 -16.867,26.813 -7.647,26.813

## Keep-outs
Keep-Out Layer:
  circle w0.127: c23,0 r1.3
  circle w0.254: c0,0 r24.8
  circle w0.127: c-23,0 r1.3

## Other copper
Top Layer:
  region net VBAT_OUT: -4.104,18.994 -2.009,16.899 -0.131,18.777 -2.251,20.897 -4.104,19.044
Bottom Layer:
  region net VBAT: -9.367,0.494 -8.383,-0.489 -8.383,-1.402 -8.033,-1.752 -8.033,-1.778 -8.345,-2.09 -8.376,-2.09 -8.376,-2.083 -8.648,-1.811 -8.78,-1.811 -10.123,-0.468 -10.123,-0.262
  region net VCC_3V: -6.569,-1.291 -6.565,-1.291 -6.315,-1.541 -5.703,-1.541 -4.808,-0.646 -4.713,-0.646 -2.416,-2.943 -2.416,-3.005 -3.065,-3.654 -3.362,-3.654 -4.953,-2.063 -6.493,-2.063 -6.917,-1.639
  region net VBAT: -12.664,12.246 -12.324,12.586 -12.324,12.731 -12.918,13.325 -13.515,13.325 -13.786,13.054 -13.786,12.647 -13.385,12.246
  region net NetL6_1: -11.252,13.423 -11.252,13.42 -11.566,13.106 -11.566,13.057 -11.384,12.875 -11.306,12.875 -10.522,13.659 -10.522,14.063 -11.323,14.864 -12.063,14.864 -12.977,15.778 -13.101,15.778 -13.531,15.348 -13.531,15.222 -12.635,14.326 -11.426,14.326 -11.108,14.008 -11.108,13.567 -11.566,13.109 -11.566,13.104
  region net VBAT_OUT: -10.947,13.028 -10.947,13.032 -10.692,13.287 -9.631,13.287 0.943,23.861 3.472,23.861 4.866,22.467 4.866,22.026 -0.895,16.265 -3.915,16.265 -4.338,15.842 -4.893,15.842 -8.914,11.821 -9.21,11.821 -10.196,12.807 -10.657,12.807 -10.96,12.504 -11.043,12.504 -11.202,12.663 -11.202,12.773

## Silkscreen, mask and mechanical layers (free items; w line width, h text height)
Top Overlay:
  lines w0.127: -21.138,20.886 -19.254,22.771 ; -19.806,22.771 -19.254,22.771 ; -19.254,22.192 -19.254,22.771 ; -19.25,22.775 -19.254,22.771 ; -15.425,17.679 -13.541,15.795 ; -12.086,17.734 -11.507,17.734 ; -11.507,18.286 -11.507,17.734 ; -11.503,17.73 -11.507,17.734
  text "Y" at -18.167,23.025 h1.02 r45
  text "X" at -11.683,15.47 h1.02 r45
Mechanical 1:
  circle w0.127: c23,0 r1.2
  circle w0.254: c0,0 r25
  circle w0.127: c-23,0 r1.2
  lines w0.127: -28.512,-2.114 1.893,28.292 32.299,-2.114 1.893,-32.52 -28.512,-2.114

## Text inside footprints (layer, text, board x,y; h text height)
BATT: Bottom Overlay "+" at -13.897,-13.389 h1.02 r315